# Altium PCB 驱动PCB第4次.PcbDoc
Units mil, origin at the board's own origin, x right, y up, seen from the top; angles counter-clockwise.
Board outline 10400 x 7050 mil, 2 copper layers (Top Layer, Bottom Layer); 59 components, 30 nets, 169 pads, 31 vias.
Unrouted connection lines stored in the file: 4.
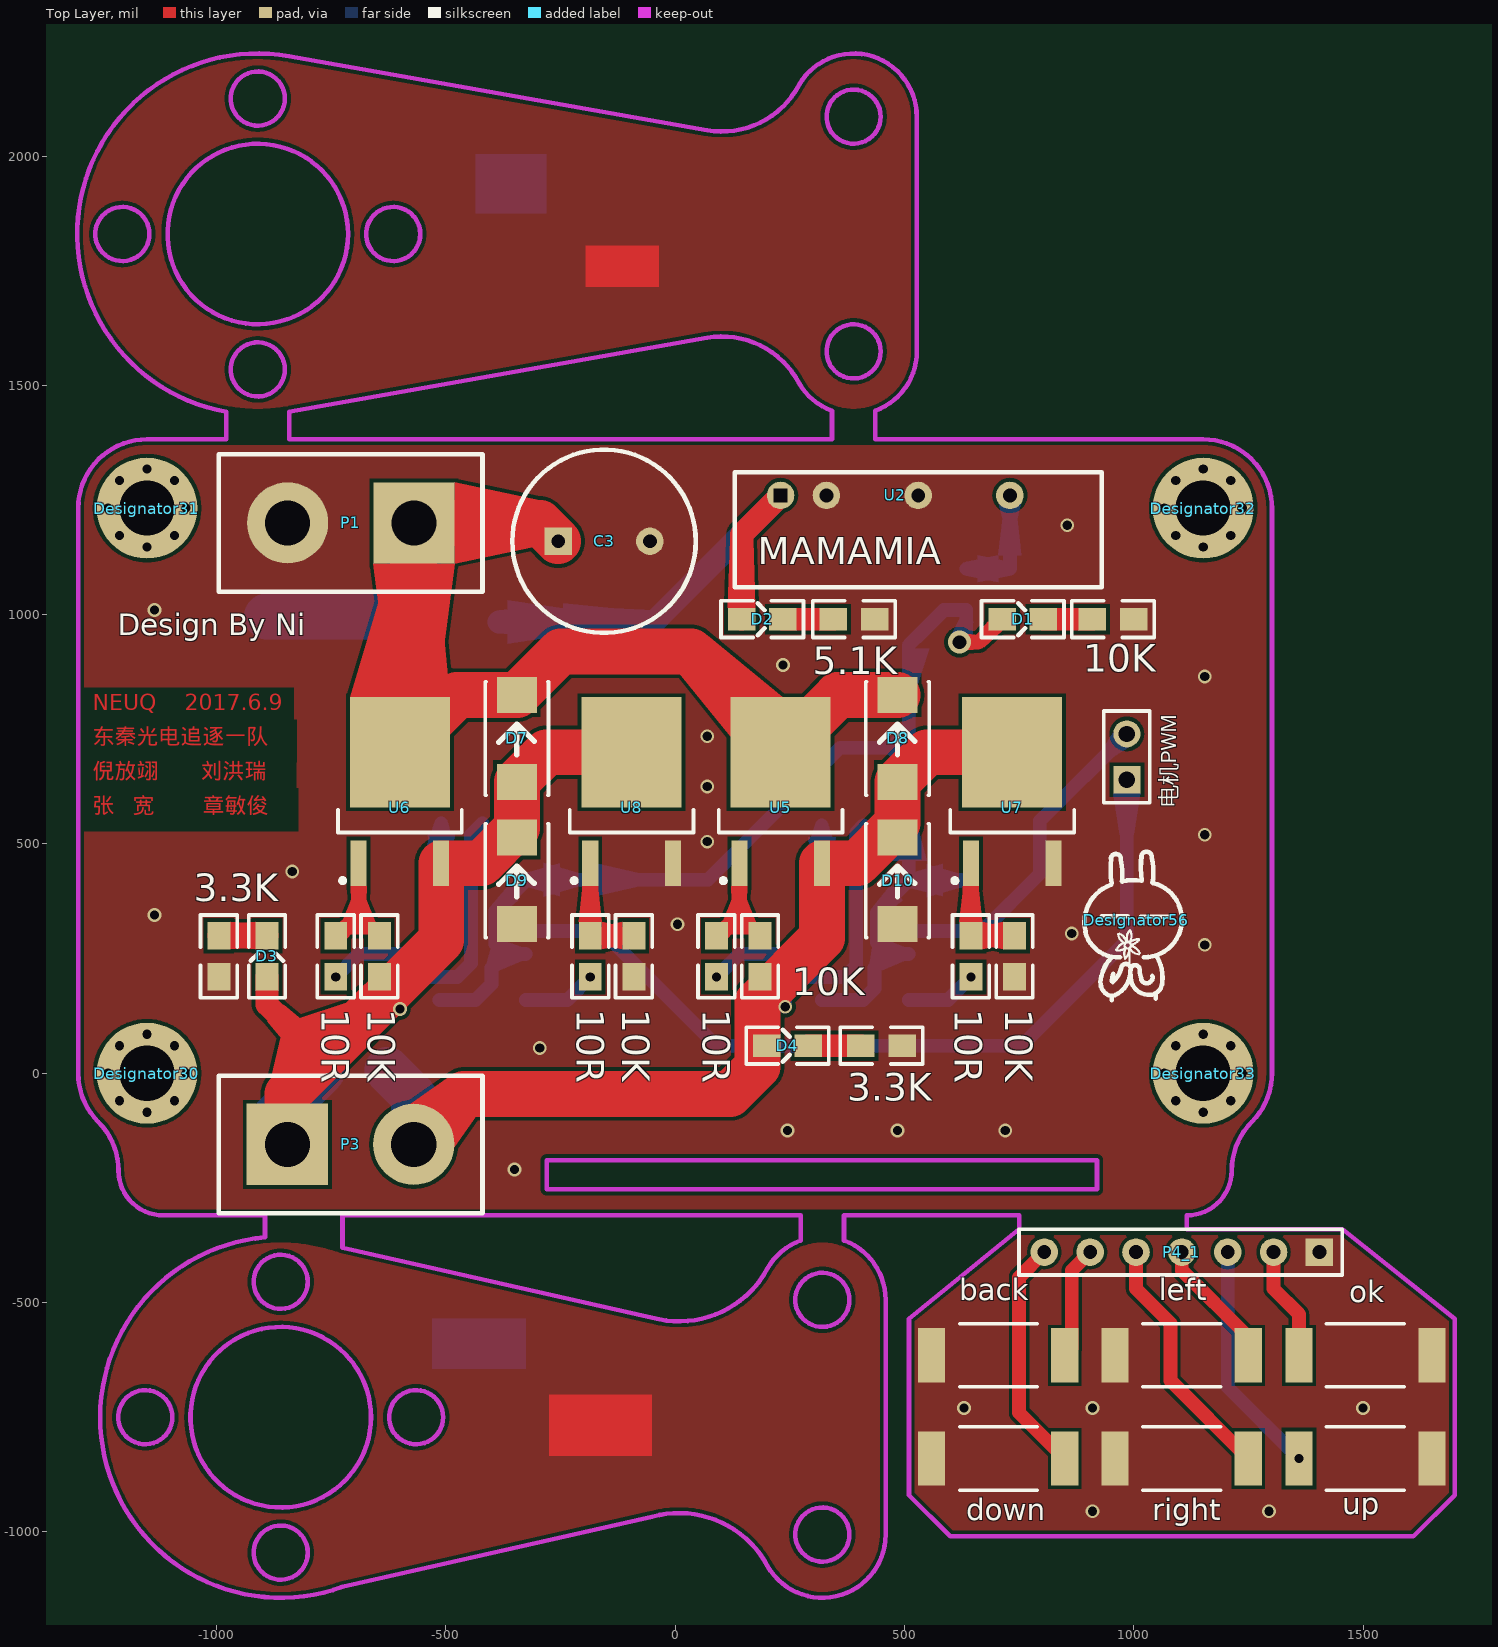
[diagram p0: Top Layer view]
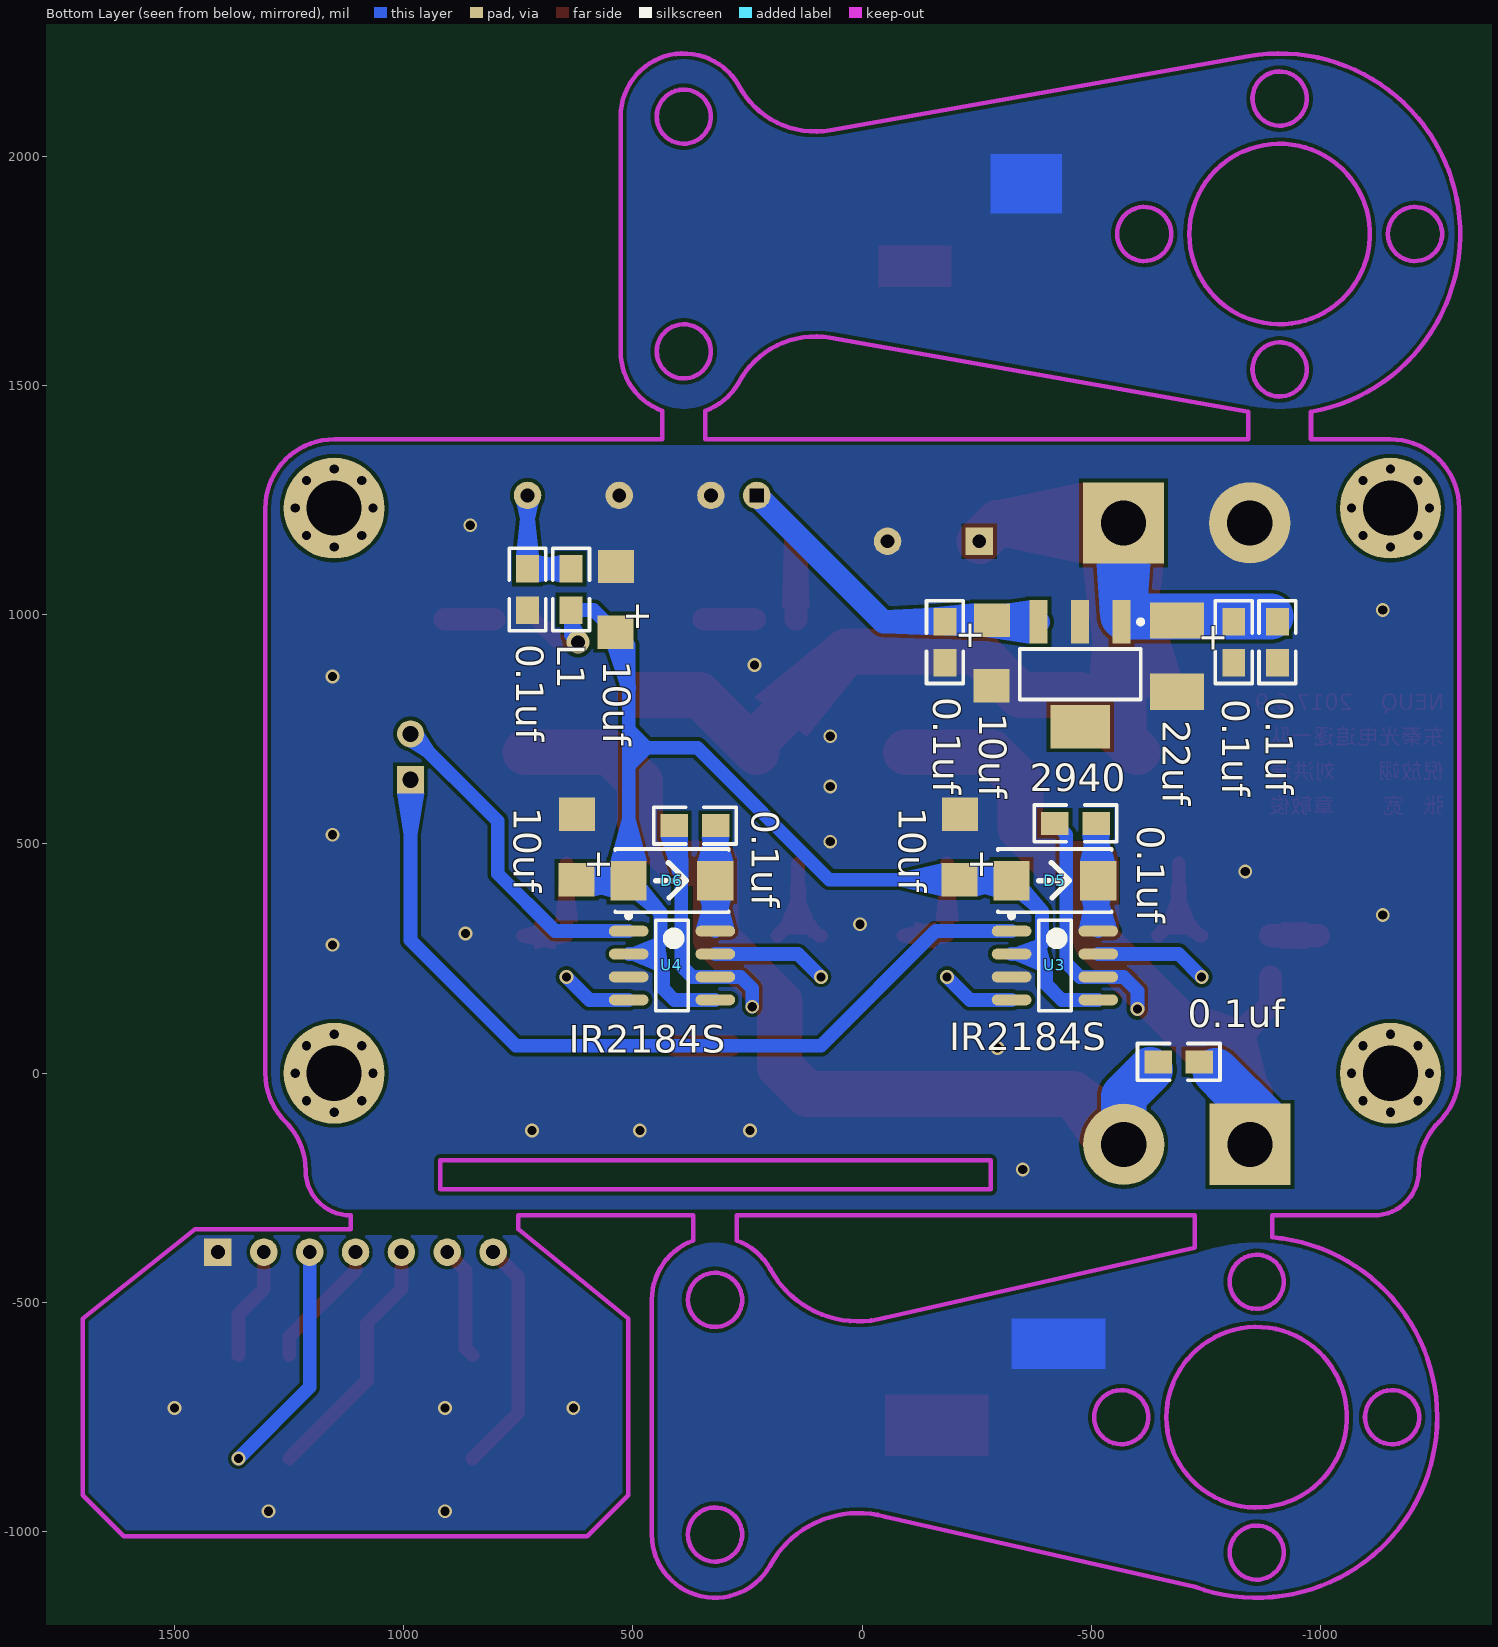
[diagram p1: Bottom Layer view, seen from below]

## Layer stack, top to bottom
Top Solder: solder mask 0.4, Solder Resist, Dk 3.5
Top Layer: signal copper 1.4
Dielectric 1: dielectric 12.6, FR-4, Dk 4.8
Bottom Layer: signal copper 1.4
Bottom Solder: solder mask 0.4, Solder Resist, Dk 3.5

## Board outline
-2836.57,-3020 -2836.57,4030 7563.43,4030 7563.43,-3020

## Design rules (kind name [scope] priority, off if disabled: settings)
Clearance [All] p1: gap=8
ComponentClearance [All] p1: gap=0 collisioncheckmode=3 verticalgap=0 showdistances=FALSE
HoleSize [All] p1: absolutevalues=TRUE maxlimit=200 minlimit=5 maxpercent=80.000 minpercent=20.000
PlaneClearance [All] p1: clearance=10
PlaneConnect [All] p1: planeconnectstyle=Direct reliefexpansion=20 reliefentries=4 reliefconductorwidth=10 reliefairgap=10
PolygonConnect [All] p1: connectstyle=Direct reliefconductorwidth=10 reliefentries=4 polygonreliefangle="90 Angle" airgapwidth=10
RoutingVias [All] p1: holewidth=15 width=25 viastyle="Through Hole" minholewidth=5 minwidth=10 maxholewidth=180 maxwidth=200
ShortCircuit [InNet('No Net') vs InNet('No Net')] p1: allowed=TRUE
SilkToSilkClearance [All] p1: silktosilkclearance=0
SolderMaskExpansion [All] p1: expansion=4
Width [All] p1: maxlimit=200 minlimit=8 preferedwidth=30
24 further rules are at their usual default settings.

## Classes and differential pairs
component class 驱动PCB第4次: 0.1uf 3.3K 5.1K 10K 10R 10uf 10UF 22uf 2940 C3 D1 D2 D3 D4 D5 D6 D7 D8 D9 D10 L1 P1 P3 U2 U3 U4 U5 U6 U7 U8 电机PWM

## Components (designator, comment, footprint, x,y, rotation, side; value= is the part's Value field where it differs from the comment)
0.1uf "C-0.1uf" 0805 -735,25 r0 bottom (schematic designator C13)
0.1uf "C-0.1uf" 0805 410,540 r180 bottom (schematic designator C10)
0.1uf "C-0.1uf" 0805 -420,545 r180 bottom (schematic designator C9)
0.1uf "C-0.1uf" 0805 730,1010 r90 bottom (schematic designator C8)
0.1uf "C-0.1uf" 0805 -180,895 r90 bottom (schematic designator C6)
0.1uf "C-0.1uf" 0805 -810,895 r90 bottom (schematic designator C5)
0.1uf "C-0.1uf" 0805 -905,985 r270 bottom (schematic designator C4)
3.3K "Res2" 0805 405,60 r0 top (schematic designator R4)
3.3K "Res2" 0805 -995,300 r270 top (schematic designator R3)
5.1K "Res2" 0805 345,990 r0 top (schematic designator R2)
10K "Res2" 0805 740,210 r90 top (schematic designator R12)
10K "Res2" 0805 -90,300 r270 top (schematic designator R11)
10K "Res2" 0805 185,210 r90 top (schematic designator R8)
10K "Res2" 0805 -645,300 r270 top (schematic designator R7)
10K "Res2" 0805 910,990 r0 top (schematic designator R1)
10R "Res2" 0805 645,300 r270 top (schematic designator R10)
10R "Res2" 0805 -185,210 r90 top (schematic designator R9)
10R "Res2" 0805 90,300 r270 top (schematic designator R6)
10R "Res2" 0805 -740,210 r90 top (schematic designator R5)
10uf "C-10uf钽电容" 10uf钽电容 620,490 r90 bottom (schematic designator C12)
10uf "C-10uf钽电容" 10uf钽电容 -215,490 r90 bottom (schematic designator C11)
10uf "C-10uf钽电容" 10uf钽电容 535,1030 r90 bottom (schematic designator C7)
10uf "C-10uf钽电容" 10uf钽电容 -280,920 r270 bottom (schematic designator C2)
22uf "C-22uf钽电容" 22uf钽电容 -685,910 r180 bottom (schematic designator C1)
2940 "LM2940" lm2940 -475,870 r270 bottom (schematic designator U1)
back "白按键" 白按键 705,-615 r90 top (schematic designator S2)
C3 "C-470电解电容" C-470uF电解电容 -155,1160 r0 top
D1 "LED0" LED 758,990 r0 top
D2 "LED0" LED 190,990 r0 top
D3 "LED0" LED -890,255 r90 top
D4 "LED0" LED 245,60 r0 top
D5 "SS14" "二极管SS14 6032MM" -420,420 r180 bottom
D6 "SS14" "二极管SS14 6032MM" 415,420 r180 bottom
D7 "SS14" "二极管SS14 6032MM" -345,730 r90 top
D8 "SS14" "二极管SS14 6032MM" 485,730 r90 top
D9 "SS14" "二极管SS14 6032MM" -345,420 r90 top
D10 "SS14" "二极管SS14 6032MM" 485,420 r90 top
Designator30 "Comment" 螺丝固定过孔 -1151.57,0 r0 top
Designator31 "Comment" 螺丝固定过孔 -1151.57,1232.28 r0 top
Designator32 "Comment" 螺丝固定过孔 1151.57,1232.28 r0 top
Designator33 "Comment" 螺丝固定过孔 1151.57,0 r0 top
Designator56 "Comment" TUSIJI_21 1005,335 r0 top
down "白按键" 白按键 705,-840 r90 top (schematic designator S1)
L1 "Inductor" 0805 635,1010 r90 bottom
left "白按键" 白按键 1105,-615 r90 top (schematic designator S4)
ok "白按键" 白按键 1505,-615 r270 top (schematic designator S6)
P1 "电源接口" 14AWG接口x2 -570,1200 r180 top
P3 "电源接口" 14AWG接口x2 -845,-155 r0 top
P4_1 "Header7X1" HDR7X1 1405,-390 r180 top (schematic designator P4)
right "白按键" 白按键 1105,-840 r90 top (schematic designator S3)
U2 "B0512S-2W" MICRODC5-15 230,1260 r0 top
U3 "IR2184S" IR2184S -420,235 r180 bottom
U4 "IR2184S" IR2184S 415,235 r180 bottom
U5 "IRLR7843" IRLR7843 230,700 r90 top
U6 "IRLR7843" IRLR7843 -600,700 r90 top
U7 "IRLR7843" IRLR7843 735,700 r90 top
U8 "IRLR7843" IRLR7843 -95,700 r90 top
up "白按键" 白按键 1505,-840 r270 top (schematic designator S5)
电机PWM "PWM输入" PWM接口 985,640 r90 top (schematic designator P2)

## Footprints (in the part's own frame and the unit in brackets; to place one, negate y for a bottom-side part, rotate by r counter-clockwise, add the part's x,y. Pads: shape width x height; smd on the part's side, far side on the other; paste and mask are expansions set on the pad)
10uf钽电容 [mil]
  rect 72.99x78.74 smd: 1(-68,3) 2(75,2)
14AWG接口x2 [mm] "电源洞洞"
  rect 4.5x4.5 hole 2.5: 1(-0.015,0)
  round 4.5 hole 2.5: 2(6.985,0)
  silkscreen extent -3.81,-3.81 10.79,3.81
22uf钽电容 [mil]
  rect 118.11x78.74 smd: 1(1,77) 2(1,-78)
0805 [mil]
  rect 60x50 smd: 1(0,0) 2(90,0)
  silkscreen extent -45,-40 135,40
C-470uF电解电容 [mil] "可用于470uF,1000uF,2200uF"
  rect 60x60 hole 30: 1(-100,0)
  round 60 hole 30: 2(100,0)
  silkscreen extent -200,-200 200,200
HDR7X1 [mil]
  rect 60x60 hole 30: 1(0,0)
  round 60 hole 30: 2(100,0) 3(200,0) 4(300,0) 5(400,0) 6(500,0) 7(600,0)
  silkscreen extent -50,-50 655,50
IR2184S [mm]
  oval 2.2x0.6 smd: 1(-2.4,1.905) 2(-2.4,0.635) 3(-2.4,-0.635) 4(-2.4,-1.905) 5(2.4,-1.905) 6(2.4,-0.635) 7(2.4,0.635) 8(2.4,1.905)
  silkscreen extent -2.53,-2.5 0.9,2.88, body extent -2,-2.5 2,2.5, height 1.75
IRLR7843 [mil] "D2-PAK, 4-Leads, Body 8.8x10.4mm, Pitch 2.54mm, Lead Span 15.1mm, IPC High D"
  rect 100x35 smd: 1(-242,90) 3(-242,-90)
  rect 240x218 smd: 2(0,0)
  silkscreen extent -285,-135 -125,135, body extent -160,-125 45,125, height 96
LED [mil]
  rect 60x50 smd: 1(-45,0) 2(45,0)
  silkscreen extent -90,-40 90,40
lm2940 [mm]
  rect 2.4x1 smd: 1(-2.9,2.3) 2(-2.9,0) 3(-2.9,-2.3)
  rect 2.4x3.3 smd: 4(2.9,0)
  silkscreen extent -3.02,-3.35 1.4,3.47, body extent -1.85,-3.35 1.85,3.35, height 1.8
MICRODC5-15 [mil]
  round 60 hole 30 square: 1(0,0)
  round 60 hole 30: 2(100,0) 3(300,0) 4(500,0)
  silkscreen extent -100,-200 700,50
PWM接口 [mm] "Connector; Header; 2 Po"
  rect 1.5x1.5 hole 0.9: 1(0,0)
  round 1.5 hole 0.9: 2(2.54,0)
  silkscreen extent -1.27,-1.27 3.81,1.27
TUSIJI_21 [mil] "TUSIJI"
  silkscreen extent -112,-176 100,148
"二极管SS14 6032MM" [mm] "Capacitor, SM Tantalum; Body 6.0 x 3.2"
  rect 2x2.2 smd: 1(-2.4,0) 2(2.4,0)
  silkscreen extent -3.15,-1.75 3.15,1.75
白按键 [mm]
  rect 3x1.5 smd: 1(0,-3.675) 2(0,3.7)
  silkscreen extent -1.75,-2.15 1.75,2.15, body extent -1.85,-2.83 1.85,2.75, height 2.5
螺丝固定过孔 [mil] "螺丝固定过孔"
  round 30 hole 20: 1(-85,0) 1(-60,-60) 1(-60,60) 1(0,-85) 1(0,85) 1(60,-60) 1(60,60) 1(85,0)
  round 220 hole 120 unplated: 1(0,0)

## Part data
0.1uf 0.1uf 0.1uf 0.1uf 0.1uf 0.1uf 0.1uf: "Capacitor"
3.3K 3.3K 5.1K 10K 10K 10K 10K 10K 10R 10R 10R 10R: "Resistor"
10uf 10uf 10uf 10uf 22uf: "Polarized Capacitor (Axial)"
2940: "1A Low Dropout Regulator"
C3: "Polarized Capacitor (Surface Mount)"
D1 D2 D3 D4: "Typical INFRARED GaAs LED"
D5 D6 D7 D8 D9 D10: library part Diode, "Default Diode"
P1 P3 电机PWM: "Header, 2-Pin"
P4_1: "Header, 7-Pin"
U5 U6 U7 U8: "HEXFET Power MOSFET"

## Via types
v1: diameter 30, hole 20, Top Layer to Bottom Layer, 30 vias
v2: diameter 50, hole 30, Top Layer to Bottom Layer, 1 vias

## Nets (pads, with @x,y where several pads share a name; then routed paths per layer and width w, separated by ;. In a path a pad name is that pad's centre, name@x,y a point inside that pad or via, vN(x,y) a via of type N, cw(c..) or ccw(c..) an arc to the next point about the centre after c; other vN are vias at no path point)
5V: 0.1uf.2@-180,985 10uf.1@-283,988 2940.3 D2.1 U2.1 | length 1033.9
  Top Layer w50: D2.1 145,1175 U2.1
  Bottom Layer w50: 2940.3 -45.83,984.17 U2.1
7.2V: 0.1uf.1@-905,985 0.1uf.2@-810,985 22uf.1 2940.1 C3.1 D7.2 D8.2 P1.1 U5.2 U6.2 | length 2659.4
  Top Layer w100: U6.2 U6.2@-569.41,730.59 ; C3.1 -295,1200 P1.1 U6.2@-569.41,730.59 ; D8.2 354.49,824.49 U5.2 230,725 35,920 -249.49,920 D7.2 -475.51,824.49 U6.2@-569.41,730.59
  Bottom Layer w100: 0.1uf.1@-890.59,995.59 -569.41,995.59 P1.1
12V: 10uf.1@538,962 10uf.1@623,422 10uf.1@-212,422 D1.1 D5.1 D6.1 L1.1 U3.2 U3.5 U4.2 U4.5 | length 2833.4
  Top Layer w30: v2(620,940) 663,940 D1.1
  Bottom Layer w30: U3.5 -435,160 -400.31,194.69 -400.31,229.69 -370,260 ; U3.2 -370,260 ; U4.5 410,160 434.69,184.69 434.69,229.69 465,260 ; U4.2 465,260 ; v2(620,940) 635,955 L1.1 586,1010 538,962 509.49,933.49 509.49,710 ; 10uf.1@623,422 621,420 D6.1 ; -370,260 -391.82,281.82 -391.82,353.69 D5.1 -323.51,422 -212,422 72,422 360,710 509.49,710 ; 465,260 440,285 440,350.51 D6.1 ; D6.1 509.49,710
D9_1: down.1 P4_1.7 | length 514.1
  Top Layer w30: P4_1.7 750,-445 750,-740.32 down.1
D10_1: back.1 P4_1.6 | length 247.9
  Top Layer w30: back.1 865,-599.68 865,-430 P4_1.6
D11_1: P4_1.5 right.1 | length 551.4
  Top Layer w30: P4_1.5 1005,-470 1080,-545 1080,-670.32 right.1
D12_1: left.1 P4_1.4 | length 284.9
  Top Layer w30: P4_1.4 1105,-430 1249.69,-574.68 left.1
D13_1: P4_1.3 up.1 | length 514.3
  Bottom Layer w30: P4_1.3 1205,-684.68 v1(1360.32,-840)
D14_1: ok.1 P4_1.2 | length 247.9
  Top Layer w30: P4_1.2 1305,-470 1360.32,-525.32 ok.1
GND: 0.1uf.1@730,1010 0.1uf.1@-180,895 0.1uf.1@-810,895 0.1uf.2@-905,895 3.3K.2 5.1K.2 10K.1@740,210 10K.2@1000,990 10K.2@-90,210 10uf.2 22uf.2 2940.2 C3.2 D9.1 D10.1 P1.2 U2.2 U2.3 U3.3 U4.3 U7.3 U8.3
  other v1: -350,-210 245,-125 485,-125 720,-125 -295,55 1155,280 865,305 5,325 -1135,345 -835,440 70,505 1155,520 70,625 70,735 1155,865 235,890 -1135,1010 855,1195
GND_2: back.2 down.2 left.2 ok.2 P4_1.1 right.2 up.2
  other v1: 910,-955 1295,-955 630,-730 910,-730 1500,-730
HO1: 10R.1@-740,210 U3.7 | length 246.2
  Bottom Layer w30: v1(-740,210) -690,260 U3.7
HO2: 10R.2@90,210 U4.7 | length 251.2
  Bottom Layer w30: v1(90,210) 140,260 U4.7
LO1: 10R.1@-185,210 U3.4 | length 161.2
  Bottom Layer w30: U3.4 -235,160 v1(-185,210)
LO2: 10R.2@645,210 U4.4 | length 156.2
  Bottom Layer w30: U4.4 595,160 v1(645,210)
NetC8_2: 0.1uf.2@730,1100 L1.2 U2.4 | length 255
  Bottom Layer w30: L1.2 730,1100 U2.4
NetC9_2: 0.1uf.2@-510,545 D5.2 U3.8 | length 236.9
  Bottom Layer w30: U3.8 -510,314.49 0.1uf.2@-510,545
NetC10_2: 0.1uf.2@320,540 D6.2 U4.8 | length 230.2
  Bottom Layer w30: 0.1uf.2@320,540 320,310.51 U4.8
NetD1_2: 10K.1@910,990 D1.2 | length 107
  Top Layer w50: D1.2 10K.1@910,990
NetD2_2: 5.1K.1 D2.2 | length 110
  Top Layer w50: D2.2 5.1K.1
NetD3_2: 3.3K.1@-995,300 D3.2 | length 105
  Top Layer w50: 3.3K.1@-995,300 D3.2
NetD4_2: 3.3K.1@405,60 D4.2 | length 115
  Top Layer w50: D4.2 3.3K.1@405,60
NetR5_2: 10K.1@-645,300 10R.2@-740,300 U6.1 | length 245.3
  Top Layer w30: 10R.2@-740,300 -735,300 -690,345 ; U6.1 -690,345 ; 10K.1@-645,300 -690,345
NetR6_1: 10K.2@185,300 10R.1@90,300 U5.1 | length 245.3
  Top Layer w30: 10R.1@90,300 95,300 140,345 ; U5.1 140,345 ; 10K.2@185,300 140,345
NetR9_2: 10K.1@-90,300 10R.2@-185,300 U8.1 | length 253
  Top Layer w30: U8.1 -185,300 10K.1@-90,300
NetR10_1: 10K.2@740,300 10R.1@645,300 U7.1 | length 253
  Top Layer w30: U7.1 645,300 10K.2@740,300
OUTA: 0.1uf.1@-420,545 0.1uf.1@-735,25 10K.2@-645,210 D3.1 D7.1 D9.2 P3.1 U3.6 U6.3 U8.2 | length 2282.3
  Top Layer w50: D3.1 -890,150 -770,30
  Top Layer w100: P3.1 -845.59,-45.59 -770,30 -510,290 U6.3 -422,458 -345,535 D7.1 -280.51,700 U8.2
  Bottom Layer w30: v1(-600,140) -600,180 -570,210 U3.6 -475,210 -445,240 -445,520 0.1uf.1@-420,545
  Bottom Layer w100: P3.1 -845.59,-70.59 -770,5
OUTB: 0.1uf.1@410,540 0.1uf.2@-645,25 10K.1@185,210 D4.1 D8.1 D10.2 P3.2 U4.6 U5.3 U7.2 | length 2603.1
  Top Layer w100: P3.2 -460,-45 120,-45 180,15 180,155 320,295 U5.3 398,458 485,545 D8.1 549.49,700 U7.2
  Bottom Layer w30: v1(240,145) 240,185 265,210 U4.6 370.32,210 395,234.69 395,525 0.1uf.1@410,540
  Bottom Layer w100: 0.1uf.2@-627.5,7.5 -570,-50 P3.2
PWM1: U3.1 电机PWM.1 | length 1859.3
  Bottom Layer w30: U3.1 -160,310 90,60 755,60 985,290 电机PWM.1
PWM2: U4.1 电机PWM.2 | length 721
  Bottom Layer w30: U4.1 670,310 795,435 795,550 电机PWM.2
pads on no net: 2940.4 Designator30.1 Designator31.1 Designator32.1 Designator33.1

## Polygon pours and split planes (outlines as drawn)
GND_2 on Top Layer "11" (solid, remove dead copper, pour order 16): 750,-340 510,-340 510,-1020 1700,-1020 1700,-340
GND on Top Layer "9" (solid, remove dead copper, pour order 10): -894.31,-357.8 490,-357.8 490,-1360 -1485,-1360 -1485,-1290 -1485,-340 -1460,-340
GND on Top Layer "8" (solid, remove dead copper, pour order 8): -944.31,1437.8 560,1437.8 560,2340 -1350,2340 -1350,1430
GND on Top Layer "4" (solid, remove dead copper, pour order 0): -1151.57,1382.28 1301.57,1382.28 1301.57,900 1301.57,-310 970,-310 -1301.57,-310 -1301.57,105 -1301.57,1382.28 -1151.57,1382.28
GND_2 on Bottom Layer "12" (solid, remove dead copper, pour order 18): 750,-340 510,-340 510,-1025 1700,-1025 1700,-340
GND on Bottom Layer "11" (solid, remove dead copper, pour order 14): -944.31,1437.8 595,1437.8 595,1765 595,2290 -1430,2290 -1430,1405 -1380,1405
GND on Bottom Layer "10" (solid, remove dead copper, pour order 12): -894.31,-357.8 505,-357.8 505,-585 505,-1235 -1390,-1235 -1390,-345 -1375,-345
GND on Bottom Layer "5" (solid, remove dead copper, pour order 2): -1115,1382.28 -1301.57,1382.28 -1301.57,1005 -1301.57,-310 -390,-310 1301.57,-310 1301.57,315 1301.57,1382.28 -105,1382.28

## Keep-outs
Keep-Out Layer:
  circle w10: c-860,-750 r196.85
  circle w10: c-1155.28,-750 r59.06
  circle w10: c-564.72,-750 r59.06
  circle w10: c-860,-454.72 r59.06
  circle w10: c-860,-1045.28 r59.06
  circle w10: c321.1,-494.09 r59.06
  circle w10: c321.1,-1005.91 r59.06
  circle w10: c389.21,1574.09 r59.06
  circle w10: c389.21,2085.91 r59.06
  circle w10: c-910,1534.72 r59.06
  circle w10: c-910,2125.28 r59.06
  circle w10: c-614.72,1830 r59.06
  circle w10: c-1205.28,1830 r59.06
  circle w10: c-910,1830 r196.85
  lines w10: -1301.58,0 ccw(c-1151.57,0) -1257.64,-106.07 cw(c-1363.71,-212.13) -1213.71,-212.13 ccw(c-1115.84,-212.13) -1115.84,-310 -894.31,-310 -894.31,-357.8 ccw(c-860,-750) -725.35,-1119.96 -49.49,-966.85 cw(c8.48,-1178.29) 201.77,-1074.8 ccw(c321.1,-1005.91) 458.9,-1005.91 458.9,-494.09 ccw(c321.1,-494.09) 368.23,-364.61 368.23,-310 750,-310 750,-340 510,-535 510,-920 600,-1010 1610,-1010 1700,-920 1700,-535 1455,-340 1380,-340 1115.84,-340 1115.84,-310 ccw(c1115.84,-212.13) 1213.71,-212.13 cw(c1363.71,-212.13) 1257.64,-106.07 ccw(c1151.57,0) 1301.58,0 1301.58,75 1301.58,495 1301.57,1065 1301.57,1200 1301.57,1232.28 ccw(c1151.57,1232.28) 1151.57,1382.28 436.34,1382.28 436.34,1444.61 ccw(c389.21,1574.09) 527.01,1574.09 527.01,2085.91 ccw(c389.21,2085.91) 269.88,2154.8 cw(c102.54,2242.34) 69.74,2056.36 -841.63,2217.72 ccw(c-910,1830) -978.37,1442.28 -978.37,1382.28 -1000,1382.28 -1151.57,1382.28 ccw(c-1151.57,1232.28) -1301.57,1232.28 -1301.57,0 ; -841.63,1382.28 -841.63,1442.28 69.74,1603.64 cw(c102.54,1417.66) 269.88,1505.2 ccw(c389.21,1574.09) 342.08,1444.61 342.08,1382.28 -841.63,1382.28 ; -725.35,-380.04 -725.35,-310 273.97,-310 273.97,-364.61 ccw(c321.1,-494.09) 201.77,-425.2 cw(c8.48,-321.71) -49.5,-533.15 -725.35,-380.04 ; -280,-252.99 920,-252.99 920,-190 -280,-190 -280,-252.99

## Other copper
Top Layer:
  rectangle net GND: -275,-835 -50,-700
  rectangle net GND: -195,1715 -35,1805
  text "NEUQ    2017.6.9" at -1270,780 h60
  text "东秦光电追逐一队" at -1270,705 h60
  text "倪放翊       刘洪瑞" at -1270,630 h60
  text "张   宽        章敏俊" at -1270,555 h60
Bottom Layer:
  rectangle net GND: -435,1875 -280,2005
  rectangle net GND: -530,-645 -325,-535

## Silkscreen, mask and mechanical layers (free items; w line width, h text height)
Top Overlay:
  text "Design By Ni" at -1215,940 h80
Top Solder:
  text "NEUQ    2017.6.9" at -1270,780 h60
  text "东秦光电追逐一队" at -1270,705 h60
  text "倪放翊       刘洪瑞" at -1270,630 h60
  text "张   宽        章敏俊" at -1270,555 h60

## Text inside footprints (layer, text, board x,y; h text height)
10uf: Bottom Overlay "+" at -235,490 h60 r90
10uf: Bottom Overlay "+" at 600,490 h60 r90
10uf: Bottom Overlay "+" at 515,1030 h60 r90
10uf: Bottom Overlay "+" at -260,920 h60 r270
22uf: Bottom Overlay "+" at -790,915 h60 r270
U2: Top Overlay "MAMAMIA" at 180,1110 h59.06